# Altium PCB Telemetry_PCB_2.PcbDoc
Units mm, origin at the board's own origin, x right, y up, seen from the top; angles counter-clockwise.
Board outline 101.5 x 83.5 mm, 2 copper layers (Top Layer, Bottom Layer); 55 components, 54 nets, 242 pads, 8 vias.
Unrouted connection lines stored in the file: 34.
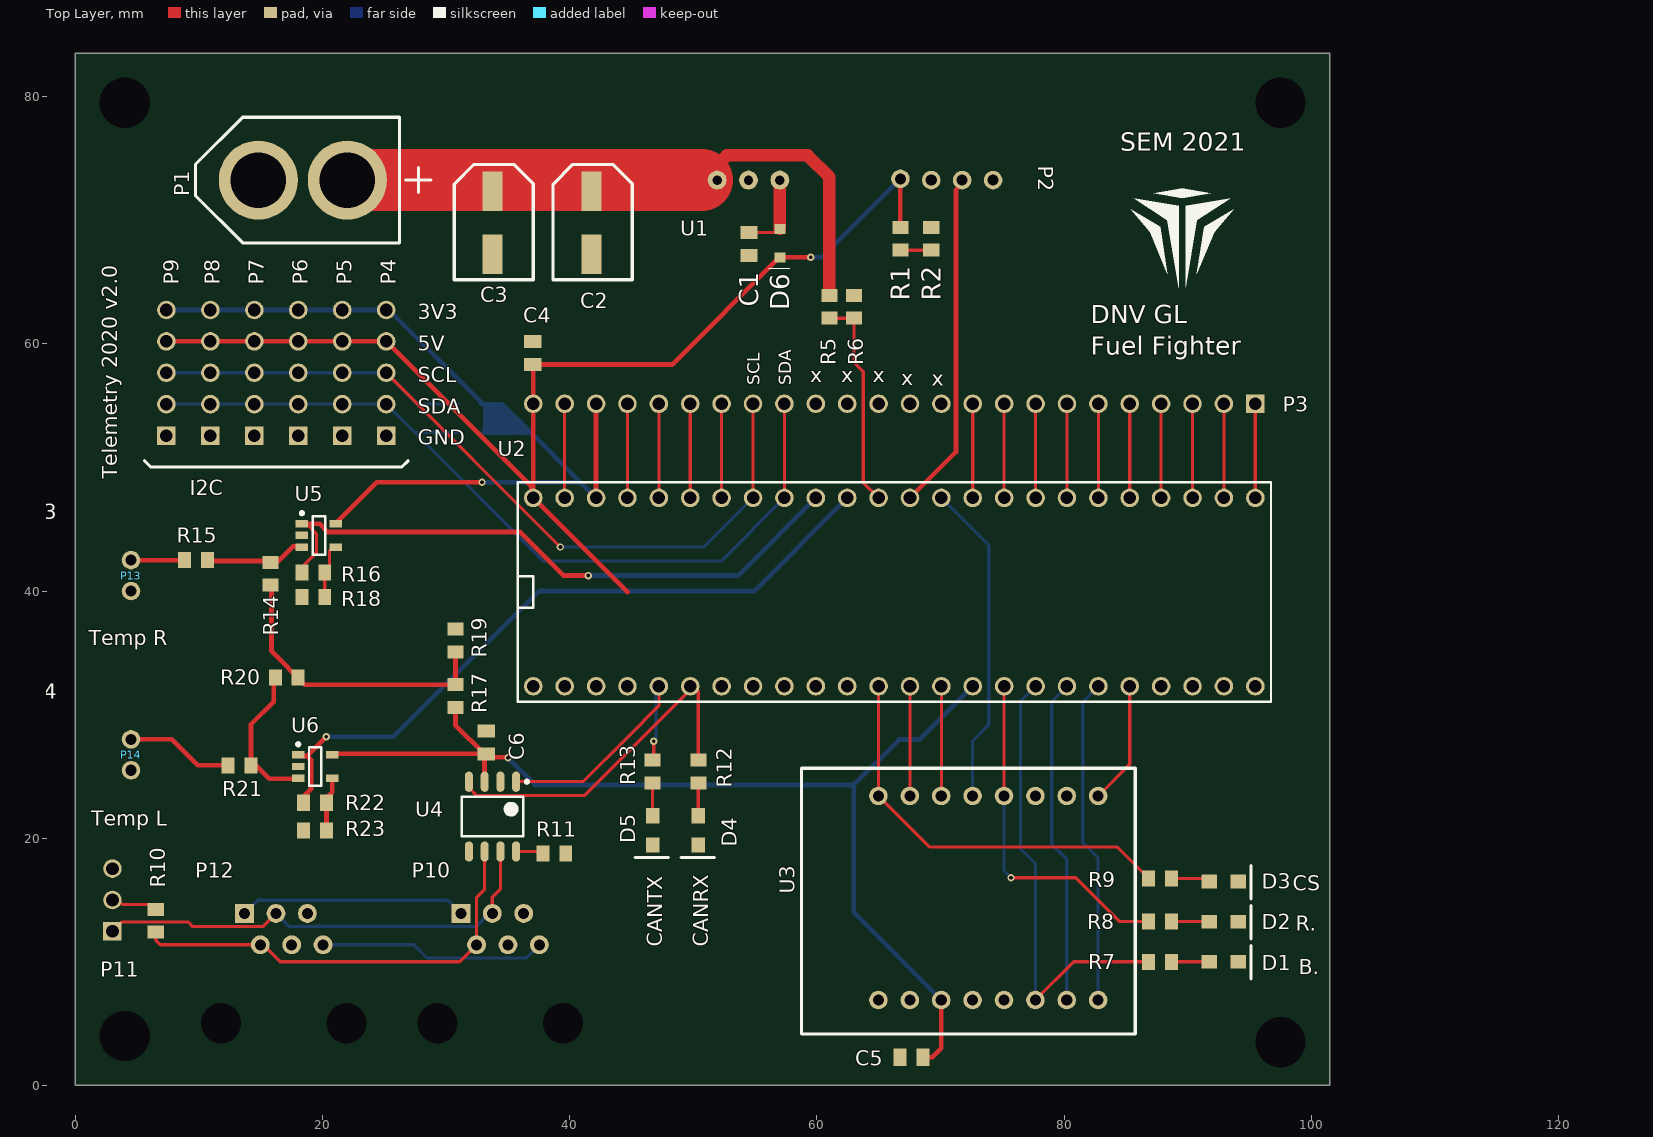
[diagram p0: Top Layer view]
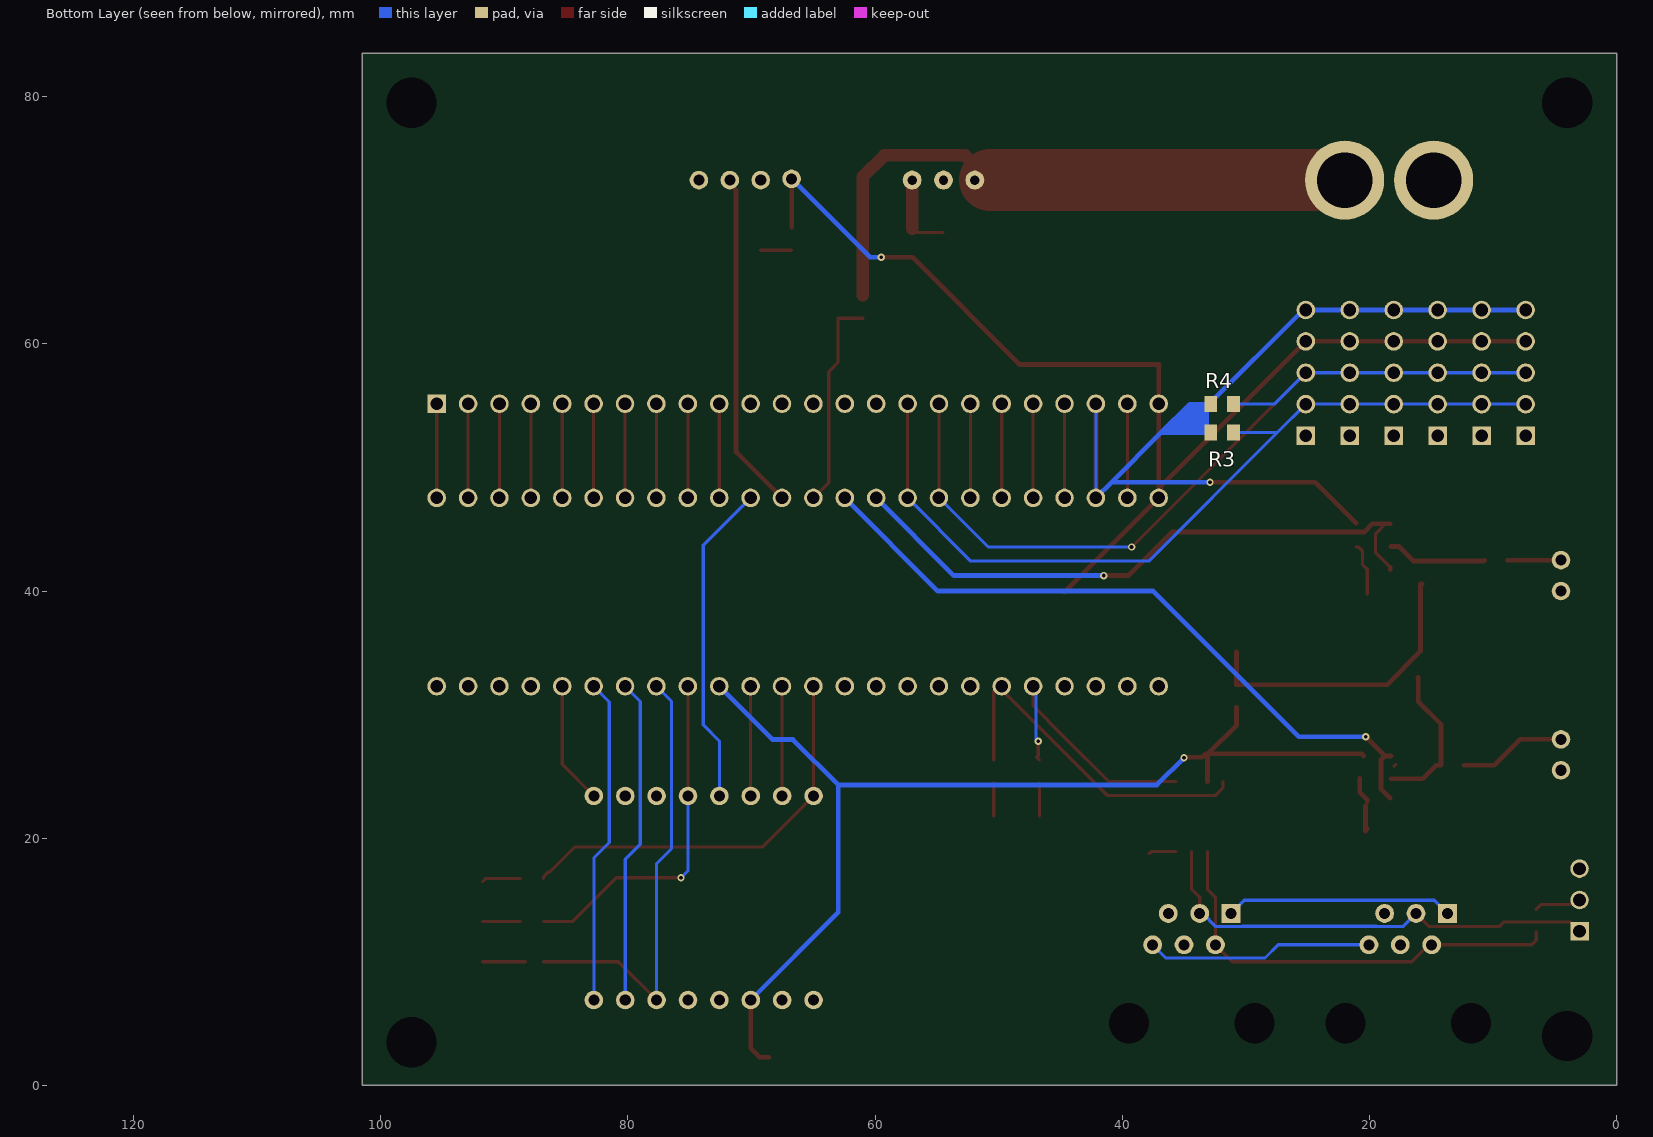
[diagram p1: Bottom Layer view, seen from below]
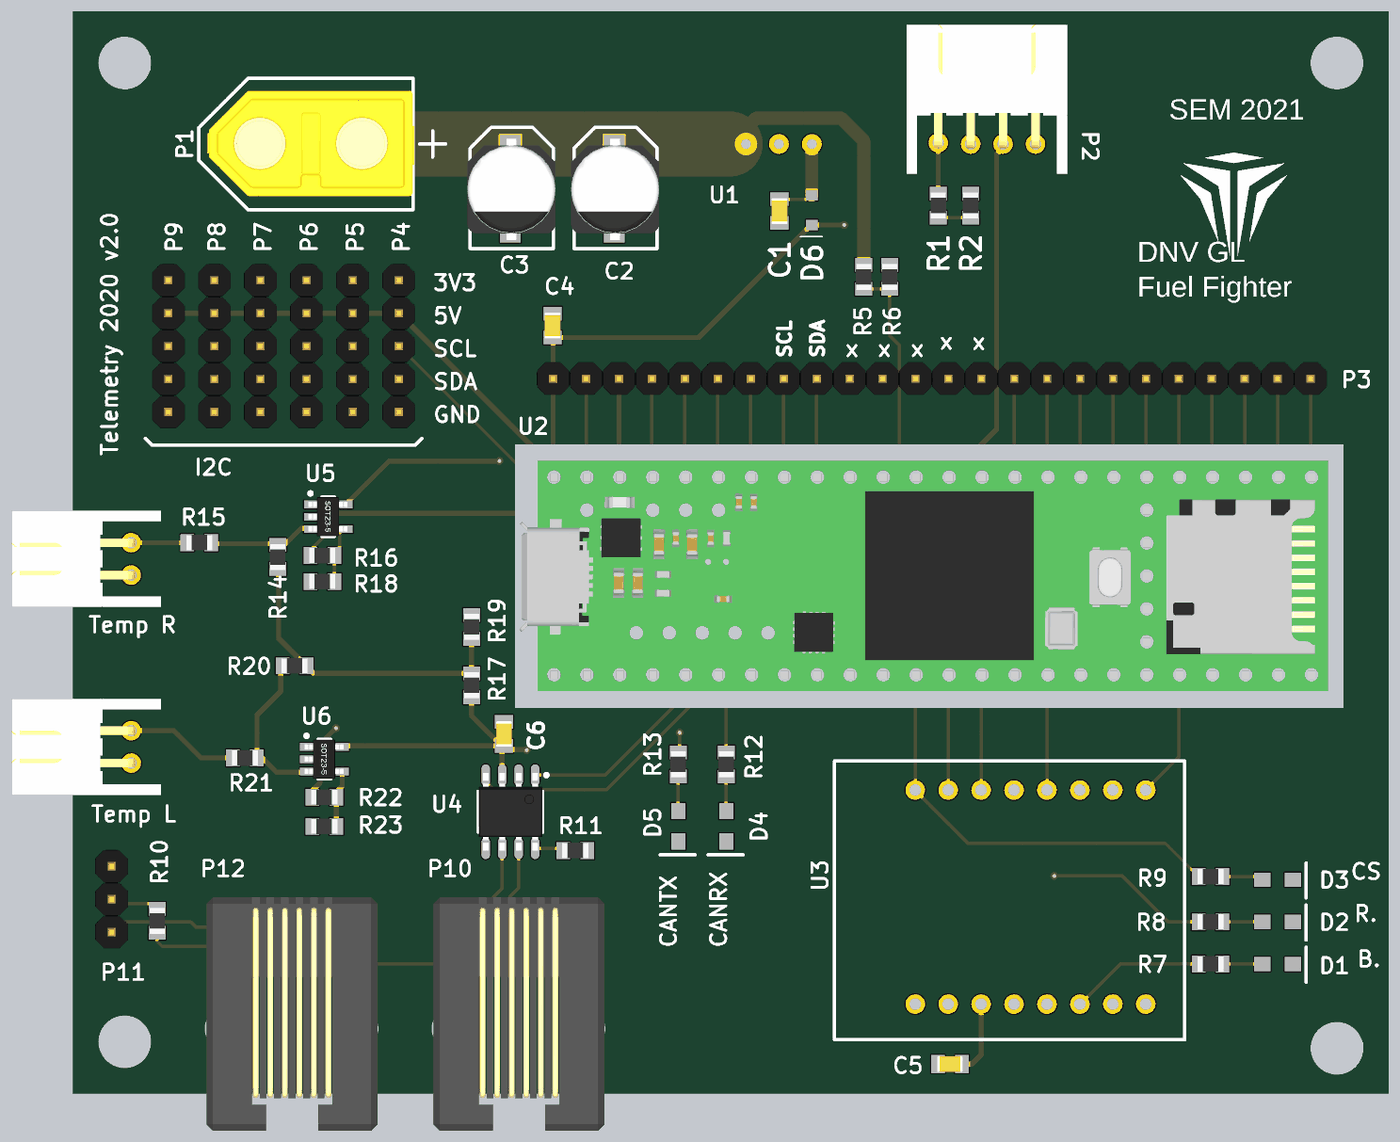
[diagram p2: 3D render of the assembled board from above, using the file's embedded part models]

## Layer stack, top to bottom
Top Solder: solder mask 0.0102, Solder Resist, Dk 3.5
Top Layer: signal copper 0.0356
Dielectric 1: dielectric 0.32, FR-4, Dk 4.8
Bottom Layer: signal copper 0.0356
Bottom Solder: solder mask 0.0102, Solder Resist, Dk 3.5

## Board outline
0,0 0,83.5 101.5,83.5 101.5,0

## Design rules (kind name [scope] priority, off if disabled: settings)
Clearance [All] p1: gap=0.178 ignorepadtopadclearanceinfootprint=FALSE
HoleSize [All] p1: absolutevalues=TRUE maxlimit=25.4 minlimit=0.025 maxpercent=80.000 minpercent=20.000
MinimumSolderMaskSliver [All] p1: minsoldermaskwidth=0.076
PlaneConnect [All] p1: planeconnectstyle=Relief reliefexpansion=0.508 reliefentries=4 reliefconductorwidth=0.508 reliefairgap=0.254
PolygonConnect PolygonConnect_XT-60 [HasFootprint('XT-60')] p1: thpad.connectstyle=Relief thpad.reliefconductorwidth=2.5 thpad.reliefentries=4 thpad.polygonreliefangle="90 Angle" thpad.airgapwidth=0.254 smdpad.connectstyle=Relief smdpad.reliefconductorwidth=0.254 smdpad.reliefentries=4 smdpad.polygonreliefangle="90 Angle" smdpad.airgapwidth=0.254 via.connectstyle=Relief via.reliefconductorwidth=0.254 via.reliefentries=4 via.polygonreliefangle="90 Angle" via.airgapwidth=0.254
PolygonConnect [All] p2: thpad.connectstyle=Relief thpad.reliefconductorwidth=0.762 thpad.reliefentries=4 thpad.polygonreliefangle="90 Angle" thpad.airgapwidth=0.254 smdpad.connectstyle=Relief smdpad.reliefconductorwidth=0.762 smdpad.reliefentries=4 smdpad.polygonreliefangle="90 Angle" smdpad.airgapwidth=0.254 via.connectstyle=Direct via.reliefconductorwidth=0.762 via.reliefentries=4 via.polygonreliefangle="90 Angle" via.airgapwidth=0.254
RoutingVias [All] p1: holewidth=0.3 width=0.6 viastyle="Through Hole" minholewidth=0.3 minwidth=0.6 maxholewidth=0.6 maxwidth=1.27 viatemplateguid#1={B7852F3B-45DD-46EC-AEA8-30D5E9FE662B} viatemplatename#1=v60h30
SilkToSolderMaskClearance [IsPad] p1: minsilkscreentomaskgap=0.178 clearancetoexposedcopper=TRUE
SolderMaskExpansion [All] p1: expansion=0.102 istentingtop=FALSE
Width [All] p1: maxlimit=7.62 minlimit=0.254 preferedwidth=0.254
26 further rules are at their usual default settings.

## Classes and differential pairs
component class Telemetry_temp_meas: P13 P14 R14 R15 R16 R17 R18 R19 R20 R21 R22 R23 U5 U6
component class Telemetry_canbus: C6 D4 D5 P10 P11 P12 R10 R11 R12 R13 U4
component class Telemetry_schematic: C1 C2 C3 C4 C5 D1 D2 D3 D6 P1 P2 P3 P4 P5 P6 P7 P8 P9 R1 R2 R3 R4 R5 R6 R7 R8 R9 U1 U2 U3

## Components (designator, comment, footprint, x,y, rotation, side; value= is the part's Value field where it differs from the comment)
C1 "SMD" C_SMD_0805_pcb 54.5,68.075 r270 top value=1u
C2 "C_EL_SMT_Ø6.3" C_EL_SMT_Ø6.3 41.75,72.35 r90 top value=10u
C3 "C_EL_SMT_Ø6.3" C_EL_SMT_Ø6.3 33.75,72.35 r90 top value=10u
C4 "SMD" C_SMD_0805_pcb 37,59.25 r270 top value=10u
C5 "SMD" C_SMD_0805_pcb 67.655,2.286 r180 top value=100n
C6 "SMD" C_SMD_0805_pcb 33.25,27.75 r90 top value=100n
D1 "LED" D_LED_0805 91.75,10 r0 top
D2 "LED" D_LED_0805 91.75,13.25 r0 top
D3 "LED" D_LED_0805 91.75,16.5 r0 top
D4 "LED" D_LED_0805 50.4,21.8 r270 top
D5 "LED" D_LED_0805 46.7,21.8 r270 top
D6 "D_CUS10S30" D_SC-76 57,69.3 r270 top
P1 "XT-60" XT-60 14.8,73.25 r270 top
P2 "JST_SE_4PIN" JST_SE_4PIN 76.65,76.65 r180 top
P3 "1x24_M" PIN_HEADER_M_1x24 39.588,55.154 r0 top
P4 "1x5_M" PIN_HEADER_M_1x5 25.146,62.738 r270 top
P5 "1x5_M" PIN_HEADER_M_1x5 21.59,62.738 r270 top
P6 "1x5_M" PIN_HEADER_M_1x5 18.034,62.738 r270 top
P7 "1x5_M" PIN_HEADER_M_1x5 14.478,62.738 r270 top
P8 "1x5_M" PIN_HEADER_M_1x5 10.922,62.738 r270 top
P9 "1x5_M" PIN_HEADER_M_1x5 7.366,62.738 r270 top
P10 "RJ11" RJ11_Connector 29.285,5.025 r0 top
P11 "CAN_Term" PIN_HEADER_M_1x3 3,17.54 r270 top
P12 "RJ11" RJ11_Connector 11.785,5.025 r0 top
P13 "Temp R" JST_SE_2PIN 4.5,42.5 r270 top
P14 "Temp L" JST_SE_2PIN 4.5,28 r270 top
R1 "SMD" R_SMD_0805_pcb 66.75,68.5 r270 top value=10k
R2 "SMD" R_SMD_0805_pcb 69.25,68.5 r270 top value=10k
R3 "SMD" R_SMD_0805_pcb 31.913,52.832 r180 bottom value=4.7k
R4 "SMD" R_SMD_0805_pcb 31.913,55.118 r180 bottom value=4.7k
R5 "SMD" R_SMD_0805_pcb 61,63 r90 top value=2.4M
R6 "SMD" R_SMD_0805_pcb 63,63 r270 top value=150K
R7 "SMD" R_SMD_0805_pcb 87.75,10 r180 top value=470
R8 "SMD" R_SMD_0805_pcb 87.75,13.25 r180 top value=470
R9 "SMD" R_SMD_0805_pcb 87.75,16.75 r180 top value=470
R10 "SMD" R_SMD_0805_pcb 6.5,13.325 r90 top value=120
R11 "SMD" R_SMD_0805_pcb 38.75,18.75 r180 top value=22k
R12 "SMD" R_SMD_0805_pcb 50.4,25.4 r270 top value=470
R13 "SMD" R_SMD_0805_pcb 46.7,25.4 r270 top value=470
R14 "SMD" R_SMD_0805_pcb 15.8,41.4 r270 top value=1k
R15 "SMD" R_SMD_0805_pcb 9.75,42.5 r0 top value=100k
R16 "SMD" R_SMD_0805_pcb 19.25,41.5 r180 top value=1k
R17 "SMD" R_SMD_0805_pcb 30.75,31.5 r270 top value=10k
R18 "SMD" R_SMD_0805_pcb 19.25,39.5 r0 top value=100k
R19 "SMD" R_SMD_0805_pcb 30.75,36 r270 top value=10k
R20 "SMD" R_SMD_0805_pcb 17.1,33 r0 top value=1k
R21 "SMD" R_SMD_0805_pcb 13.275,25.9 r0 top value=100k
R22 "SMD" R_SMD_0805_pcb 19.396,22.869 r180 top value=1k
R23 "SMD" R_SMD_0805_pcb 19.396,20.619 r180 top value=100k
U1 "TSR_0.6-4850WI" TSR_0.6-4850WI 51.92,73.25 r0 top
U2 "teensy_3.6" teensy_3.6 35.143,31.659 r90 top
U3 "LAMBDA80" LAMBDA62_SMT 82.753,6.909 r90 top
U4 "SN65GVD231d" SN65HVD231D_SMD 33.75,21.75 r270 top
U5 "AD8628" SOT-23-5 19.7,44.5 r0 top
U6 "AD8628" SOT-23-5 19.4,25.8 r0 top

## Footprints (in the part's own frame and the unit in brackets; to place one, negate y for a bottom-side part, rotate by r counter-clockwise, add the part's x,y. Pads: shape width x height; smd on the part's side, far side on the other; paste and mask are expansions set on the pad)
C_EL_SMT_Ø6.3 [mm]
  rect 3.2x1.6 smd: 1(-5.1,0) 2(0,0)
  silkscreen extent -7.16,-3.3 2.17,3.1, body extent -6.5,-3.47 1.3,3.33, height 5.5
C_SMD_0805_pcb [mm] "Chip Capacitor, 2-Leads, Body 2,00x1,25mm, IPC Medium Density"
  rect 1.05x1.4 smd: 1(-0.925,0) 2(0.925,0)
  body extent -1,-0.63 1,0.62, height 1.35
D_LED_0805 [mm]
  rect 1.25x1.1 smd: 1(0,0) 2(2.35,0)
  silkscreen extent 3.38,-1.4 3.38,1.3, body extent -0.3,-0.63 2.65,0.63, height 1
D_SC-76 [mm]
  rect 0.8x0.9 smd: 1(0,0) 2(2.3,0)
  silkscreen extent 3.2,-0.9 3.2,0.8, body extent 0.2,-0.7 2.1,0.7, height 0.8
JST_SE_2PIN [mm]
  round 1.5 hole 0.9: 1(0,0) 2(2.5,0)
  body extent -2.45,-9.2 4.95,2.3, height 6.1
JST_SE_4PIN [mm]
  round 1.5 hole 0.9: 1(9.9,3.3) 2(7.4,3.4) 3(4.9,3.4) 4(2.4,3.4)
  body extent -0.05,-5.8 12.35,5.7, height 6.1
LAMBDA62_SMT [mm]
  round 1.5 hole 0.9: 1(0,17.78) 2(0,15.24) 3(0,12.7) 4(0,10.16) 5(0,7.62) 6(0,5.08) 7(0,2.54) 8(0,0) 9(16.51,0) 10(16.51,2.54) 11(16.51,5.08) 12(16.51,7.62) 13(16.51,10.16) 14(16.51,12.7) 15(16.51,15.24) 16(16.51,17.78)
  silkscreen extent -2.75,-3 18.75,24, body extent -2.79,-3.05 18.8,24.13, height 4
PIN_HEADER_M_1x3 [mm]
  rect 1.5x1.5 hole 1.02: 1(5.08,0)
  round 1.5 hole 1.02: 2(2.54,0) 3(0,0)
  body extent -1.27,-1.27 6.35,1.27, height 8.34
PIN_HEADER_M_1x5 [mm]
  rect 1.5x1.5 hole 1.02: 1(10.16,0)
  round 1.5 hole 1.02: 2(7.62,0) 3(5.08,0) 4(2.54,0) 5(0,0)
  body extent -1.27,-1.27 11.43,1.27, height 8.34
PIN_HEADER_M_1x24 [mm]
  round 1.5 hole 1.02: 1(-2.54,0) 2(0,0) 3(2.54,0) 4(5.08,0) 5(7.62,0) 6(10.16,0) 7(12.7,0) 8(15.24,0) 9(17.78,0) 10(20.32,0) 11(22.86,0) 12(25.4,0) 13(27.94,0) 14(30.48,0) 15(33.02,0) 16(35.56,0) 17(38.1,0) 18(40.64,0) 19(43.18,0) 20(45.72,0) 21(48.26,0) 22(50.8,0) 23(53.34,0)
  rect 1.5x1.5 hole 1.02: 24(55.88,0)
  body extent -3.81,-1.27 57.15,1.27, height 8.34
R_SMD_0805_pcb [mm]
  rect 1.05x1.3 smd: 1(-0.925,0) 2(0.925,0)
  body extent -1,-0.6 1,0.6, height 0.65
RJ11_Connector [mil]
  rect 60x60 hole 35.04: 1(75,350)
  round 60 hole 35.04: 2(125,250) 3(175,350) 4(225,250) 5(275,350) 6(325,250)
  round 60 hole 127.95 unplated: ""(0,0) ""(400,0)
  body extent -58,-310 462,399, height 461
SN65HVD231D_SMD [mm]
  oval 1.65x0.65 smd: 1(-2.825,1.905) 2(-2.825,0.635) 3(-2.825,-0.635) 4(-2.825,-1.905) 5(2.825,-1.905) 6(2.825,-0.635) 7(2.825,0.635) 8(2.825,1.905)
  silkscreen extent -2.95,-2.5 1.6,2.91, body extent -3,-2.45 3,2.45, height 1.91
SOT-23-5 [mm] "0.95 pitch"
  rect 1x0.6 smd: 1(-1.375,0.95) 2(-1.375,0) 3(-1.375,-0.95) 4(1.375,-0.95) 5(1.375,0.95)
  silkscreen extent -1.5,-1.55 0.5,1.92, body extent -1.52,-1.5 1.48,1.5, height 1.45
teensy_3.6 [mm]
  round 1.5 hole 1.016: 0(0.635,-4.445) 1(0.635,-6.985) 2(0.635,-9.525) 3(0.635,-12.065) 4(0.635,-14.605) 5(0.635,-17.145) 6(0.635,-19.685) 7(0.635,-22.225) 8(0.635,-24.765) 9(0.635,-27.305) 10(0.635,-29.845) 11(0.635,-32.385) 12(0.635,-34.925) 13(15.875,-34.925) 14(15.875,-32.385) 15(15.875,-29.845) 16(15.875,-27.305) 17(15.875,-24.765) 18(15.875,-22.225) 19(15.875,-19.685) 20(15.875,-17.145) 21(15.875,-14.605) 22(15.875,-12.065) 23(15.875,-9.525) 24(0.635,-40.005) 25(0.635,-42.545) 26(0.635,-45.085) 27(0.635,-47.625) 28(0.635,-50.165) 29(0.635,-52.705) 30(0.635,-55.245) 31(0.635,-57.785) 32(0.635,-60.325) 33(15.875,-60.325) 34(15.875,-57.785) 35(15.875,-55.245) 36(15.875,-52.705) 37(15.875,-50.165) 38(15.875,-47.625) 39(15.875,-45.085) +3V3(0.635,-37.465) +3V3(15.875,-6.985) A21(15.875,-42.545) A22(15.875,-40.005) AGND(15.875,-4.445) GND(0.635,-1.905) GND(15.875,-37.465) VIN(15.875,-1.905)
  silkscreen extent -0.64,-61.59 17.15,-0.63, body extent -0.62,-61.66 17.16,0.7, height 7.49
TSR_0.6-4850WI [mil]
  round 60 hole 30: 1(0,0) 2(100,0) 3(200,0)
  body extent -134,-91 327,217, height 528
XT-60 [mm]
  round 6.4 hole 4.5: 1(0,7.2) 2(0,0)
  silkscreen extent -5.08,-5.08 5.08,13.97, body extent -4.11,-4.41 4.02,11.52, height 15.5

## Part data
C1 C4 C5 C6: library part C_SMD_0805
D1 D2 D3 D4 D5: library part D_LED_0805_SMD
D6: "Schottky diode, 30V reverse voltage. 220mV forward drop @1A", Supplier Part Number 1=CUS10S30H3FCT-ND, Supplier Link 1=https://www.digikey.no/product-detail/en/toshiba-semiconductor-and-storage/CUS10S30H3F/CUS10S30H3FCT-ND/5114377
P2: Supplier Part Number 1=455-2243-ND, Supplier Link 1=https://www.digikey.com/product-detail/en/jst-sales-america-inc/S4B-XH-A-LF-SN/455-2243-ND/1651041
P3: library part PIN_HEADER_M_1x24
P4 P5 P6 P7 P8 P9: library part PIN_HEADER_M_1x5
P10 P12: library part RJ11_Connector
P11: library part PIN_HEADER_M_1x3
P13 P14: library part JST_SE_2PIN
R1 R2 R3 R4 R5 R6 R7 R8 R9 R10 R11 R12 R13 R14 R15 R16 R17 R18 R19 R20 R21 R22 R23: library part R_SMD_0805
U3: library part LAMBDA_80_DIP
U4: library part SN65HVD231D_SMD
U5 U6: library part AD8628WAUJZ-R7_SOT-23-5, Supplier Part Number 1=AD8628WAUJZ-R7CT-ND, Supplier Link 1=https://www.digikey.com/product-detail/en/analog-devices-inc/AD8628WAUJZ-R7/AD8628WAUJZ-R7CT-ND/2467896

## Free pads (board coordinates)
  round 1.524 hole 4.064 unplated: 2(4,4) 2(4,79.5) 2(97.5,3.5) 2(97.5,79.5)

## Via types
v1: diameter 0.6, hole 0.3, Top Layer to Bottom Layer, tented both sides, 8 vias

## Nets (pads, with @x,y where several pads share a name; then routed paths per layer and width w, separated by ;. In a path a pad name is that pad's centre, name@x,y a point inside that pad or via, vN(x,y) a via of type N, cw(c..) or ccw(c..) an arc to the next point about the centre after c; other vN are vias at no path point)
3V3: C5.1 C6.1 P3.3 P4.5 P5.5 P6.5 P7.5 P8.5 P9.5 R3.1 R4.1 R17.2 U2.+3V3 U3.3 U4.3 U5.5 U6.5 | length 171.4
  Top Layer w0.381: U6.5@20.45,26.65 20.625,26.825 C6.1@33.075,26.825 ; U5.5@21.075,45.5 24.375,48.8 v1(32.9,48.8) ; R17.2 30.75,29.15 C6.1@33.075,26.825 ; U4.3 33.095,24.595 C6.1@33.095,26.825 ; v1(35,26.5) 34.958,26.542 33.533,26.542 C6.1 C6.1@33.095,26.825 ; U2.+3V3@42.128,47.534 P3.3 ; C5.1 69.342,2.286 70.068,3.012 U3.3@70.068,6.894 ; U3.3@70.436,7.262 70.589,7.11 U3.3@70.589,6.894 ; C6.1@33.075,26.825 C6.1@33.095,26.825
  Bottom Layer w0.254: U2.+3V3@42.128,47.534 P3.3
  Bottom Layer w0.381: P9.5 P8.5 P7.5 P6.5 P5.5 P4.5 25.362,62.738 R4.1@32.982,55.118 ; R4.1 R4.1@32.982,55.118 ; v1(32.9,48.8) 32.902,48.802 40.86,48.802 ; R3.1@33.02,52.832 36.83,52.832 ; v1(35,26.5) 37.192,24.308 62.967,24.308 ; U2.+3V3@42.128,47.534 40.86,48.802 ; U3.3@70.068,6.894 U3.3 62.967,13.995 62.967,24.308 ; U2.+3V3@72.608,32.294 68.295,27.981 66.64,27.981 62.967,24.308 ; R4.1@32.982,55.118 34.544,55.118 36.83,52.832 ; 36.83,52.832 40.86,48.802
5V: C4.2 D6.2 P2.1 P3.1 P4.4 P5.4 P6.4 P7.4 P8.4 P9.4 R1.1 U2.VIN | length 97.1
  Top Layer w0.254: 36.83,48.514 36.83,47.752 U2.VIN ; P3.1 P3.1@37.267,55.373
  Top Layer w0.381: P9.4 P8.4 P7.4 P6.4 P5.4 P4.4 36.83,48.514 ; C4.2@37,58.175 37.048,58.127 P3.1 U2.VIN 44.679,39.903 ; C4.2 48.275,58.325 56.95,67 D6.2 v1(59.5,67) ; R1.1 P2.1
  Bottom Layer w0.254: P3.1 P3.1@37.12,55.154
  Bottom Layer w0.381: v1(59.5,67) 60.4,67 P2.1
5V_CAN: P10.6 P12.6 | length 18.4
  Bottom Layer w0.254: P12.6 27.379,11.375 28.446,10.308 36.473,10.308 P10.6
48V: C2.2 C3.2 P1.1 R5.2 U1.1 | length 50.5
  Top Layer w0.508: 47.75,73 48,73.25
  Top Layer w1: 50.71,73.25 52.71,75.25 59.25,75.25 61,73.5 R5.2
  Top Layer w5: P1.1 33.75,73.25 41.75,73.25 48,73.25 50.71,73.25
GND: C1.2 C2.1 C3.1 C4.1 C5.2 C6.2 D1.2 D2.2 D3.2 D4.2 D5.2 P1.2 P2.4 P3.2 P3.15 P4.1 P5.1 P6.1 P7.1 P8.1 P9.1 P13.2 P14.2 R2.1 R6.1 R11.1 R18.1 R19.1 R23.2 U1.2 U2.AGND U2.GND U3.2 U4.2 U5.2 U6.2 | length 15.5
  Top Layer w0.254: U6.2@17.852,25.973 U6.2 ; U2.AGND P3.2 ; U2.GND@72.608,47.534 P3.15
NetC1_1: C1.1 D6.1 U1.3 | length 6.1
  Top Layer w0.254: C1.1 D6.1@56.65,69
  Top Layer w1: D6.1 U1.3
NetD1_1: D1.1 R7.1 | length 3.4
  Top Layer w0.254: R7.1@88.304,10 D1.1
NetD2_1: D2.1 R8.1 | length 3.1
  Top Layer w0.254: R8.1@88.695,13.25 D2.1
NetD3_1: D3.1 R9.1 | length 3.2
  Top Layer w0.254: R9.1 91.5,16.75 D3.1
NetD4_1: D4.1 R12.2 | length 2.7
  Top Layer w0.254: D4.1 R12.2
NetD5_1: D5.1 R13.2 | length 2.7
  Top Layer w0.254: D5.1 R13.2
NetP2_2: P2.2 R1.2 R2.2 | length 2.5
  Top Layer w0.254: R1.2 R2.2
NetP2_3: P2.3 U2.14 | length 27.5
  Top Layer w0.381: U2.14 71.25,51.256 71.25,72.467 71.75,72.967 P2.3
NetP3_4: P3.4 U2.23 | length 7.6
  Top Layer w0.254: U2.23 P3.4
NetP3_5: P3.5 U2.22 | length 7.6
  Top Layer w0.254: U2.22 P3.5
NetP3_6: P3.6 U2.21 | length 7.6
  Top Layer w0.254: U2.21 P3.6
NetP3_7: P3.7 U2.20 | length 7.6
  Top Layer w0.254: U2.20 P3.7
NetP3_8: P3.8 P4.3 P5.3 P6.3 P7.3 P8.3 P9.3 R4.2 U2.19 | length 69.5
  Top Layer w0.254: P4.3 v1(39.243,43.561) ; U2.19 P3.8
  Bottom Layer w0.254: P9.3 P8.3 P7.3 P6.3 P5.3 P4.3 27.686,55.118 R4.2 ; v1(39.243,43.561) 50.855,43.561 U2.19
NetP3_9: P3.9 P4.2 P5.2 P6.2 P7.2 P8.2 P9.2 R3.2 U2.18 | length 68.6
  Top Layer w0.254: U2.18 P3.9
  Bottom Layer w0.254: P9.2 P8.2 P7.2 P6.2 P5.2 P4.2 27.432,52.832 ; R3.2 27.432,52.832 ; U2.18 52.252,42.418 37.846,42.418 27.432,52.832
NetP3_16: P3.16 U2.A22 | length 7.6
  Top Layer w0.254: U2.A22 P3.16
NetP3_17: P3.17 U2.A21 | length 7.6
  Top Layer w0.254: U2.A21 P3.17
NetP3_18: P3.18 U2.39 | length 7.6
  Top Layer w0.254: U2.39 P3.18
NetP3_19: P3.19 U2.38 | length 7.6
  Top Layer w0.254: U2.38 P3.19
NetP3_20: P3.20 U2.37 | length 7.6
  Top Layer w0.254: U2.37 P3.20
NetP3_21: P3.21 U2.36 | length 7.6
  Top Layer w0.254: U2.36 P3.21
NetP3_22: P3.22 U2.35 | length 7.6
  Top Layer w0.254: U2.35 P3.22
NetP3_23: P3.23 U2.34 | length 7.6
  Top Layer w0.254: U2.34 P3.23
NetP3_24: P3.24 U2.33 | length 7.6
  Top Layer w0.254: U2.33 P3.24
NetP10_1: P10.1 P12.1 | length 18.4
  Bottom Layer w0.254: P12.1 14.757,14.982 30.123,14.982 P10.1
NetP10_2: P10.2 P12.2 R10.1 U4.6 | length 35.7
  Top Layer w0.254: R10.1 6.5,11.75 6.875,11.375 P12.2 15.199,11.375 16.574,10 31.085,10 P10.2 32.46,15.21 33.115,15.865 U4.6
NetP10_3: P10.3 P11.1 P12.3 U4.7 | length 38
  Top Layer w0.254: P11.1 3.77,13.23 9.105,13.23 9.487,12.848 15.163,12.848 16.17,13.855 16.17,13.975 P12.3 ; P10.3 33.73,15.23 34.385,15.885 U4.7
  Bottom Layer w0.254: P12.3 17.297,12.848 19.394,12.848 19.419,12.874 30.276,12.874 30.302,12.848 32.425,12.848 33.491,13.915 P10.3
NetP11_2: P11.2 R10.2 | length 3.8
  Top Layer w0.254: P11.2 3.418,15 3.77,14.648 6.102,14.648 R10.2
NetP13_1: P13.1 R15.1 | length 4.3
  Top Layer w0.381: P13.1 R15.1
NetP14_1: P14.1 R21.1 | length 8.7
  Top Layer w0.381: P14.1 7.8,28 9.9,25.9 R21.1
NetR5_1: R5.1 R6.2 U2.15 | length 17.4
  Top Layer w0.254: R5.1 R6.2 63,58.5 63.503,57.997 63.75,57.75 63.75,48.772 U2.15
NetR7_2: R7.2 U2.25 U3.6 | length 36.8
  Top Layer w0.254: U3.6 80.764,10 R7.2
  Bottom Layer w0.254: U3.6 77.673,17.95 76.468,19.155 76.468,31.074 U2.25
NetR8_2: R8.2 U2.24 U3.12 | length 28.3
  Top Layer w0.254: U3.12@75.148,23.404 U2.24 ; v1(75.7,16.8) 80.95,16.8 84.5,13.25 R8.2
  Bottom Layer w0.254: U3.12 75.133,17.367 v1(75.7,16.8)
NetR9_2: R9.2 U2.10 U3.16 | length 33.6
  Top Layer w0.254: U2.10 64.988,23.404 69.092,19.3 84.275,19.3 86.302,17.273 86.427,17.273 86.825,16.875 R9.2
NetR11_2: R11.2 U4.8 | length 2.2
  Top Layer w0.254: U4.8 37.65,18.925 R11.2
NetR12_1: R12.1 U2.4 U4.4 | length 28.9
  Top Layer w0.254: U4.4 31.845,24.075 32.475,23.445 41.17,23.445 49.748,32.023 U2.4 49.8,32.242 50.058,32.242 50.4,31.9 R12.1
NetR13_1: R13.1 U2.3 U4.1 | length 21.8
  Top Layer w0.254: U4.1 41.075,24.575 44.763,28.262 47.208,30.708 47.208,31.786 U2.3@46.954,32.04 ; R13.1 46.925,26.55 46.8,26.675 v1(46.8,27.85)
  Bottom Layer w0.254: v1(46.8,27.85) 46.991,28.041 46.991,32.077 U2.3
NetR14_1: R14.1 R15.2 U5.3 | length 8.1
  Top Layer w0.381: R15.2 10.75,42.425 15.75,42.425 16.425,42.425 17.6,43.6 U5.3@18.25,43.6
NetR16_1: R16.1 R18.2 U5.4 | length 4.3
  Top Layer w0.254: R18.2@20.175,39.75 20.175,41.75 20.573,42.148 20.573,43.248 20.875,43.55 U5.4
NetR16_2: R16.2 U2.17 U5.1 | length 50.4
  Top Layer w0.254: R16.2@18.325,41.925 19.5,43.1 19.5,44.646 U5.1@18.696,45.45
  Top Layer w0.381: R16.2@18.325,41.75 R16.2@18.325,41.925 ; U5.1 18.525,45.45 18.696,45.45 19.754,45.45 20.434,44.77 35.98,44.77 39.5,41.25 v1(41.5,41.25)
  Bottom Layer w0.381: v1(41.5,41.25) 53.624,41.25 U2.17
NetR20_1: R20.1 R21.2 U6.3 | length 12.4
  Top Layer w0.381: R20.1@16.075,33 16.038,32.963 16.038,31.037 14.2,29.2 R21.2 14.6,25.9 15.7,24.8 U6.3@18.25,24.8
NetR22_1: R22.1 R23.1 U6.4 | length 4.6
  Top Layer w0.381: R23.1@20.175,20.75 20.312,20.887 R23.1@20.312,20.588 ; R22.1@20.175,22.95 20.175,23.125 20.775,23.725 U6.4 ; R23.1 R22.1@20.321,22.619
NetR22_2: R22.2 U2.16 U6.1 | length 56.7
  Top Layer w0.381: U6.1@18.259,26.659 18.25,26.65 18.771,26.65 ; R22.2@18.325,23.242 19.068,23.985 19.068,26.353 18.771,26.65 ; v1(20.3,28.2) 18.771,26.671 18.771,26.65
  Bottom Layer w0.381: v1(20.3,28.2) 25.7,28.2 37.5,40 54.914,40 U2.16
NetU2_11: U2.11 U3.15 | length 8.9
  Top Layer w0.254: U3.15@67.528,23.404 U2.11
NetU2_12: U2.12 U3.14 | length 8.9
  Top Layer w0.254: U3.14@70.068,23.404 U2.12
NetU2_13: U2.13 U3.13 | length 26.2
  Bottom Layer w0.254: U2.13 73.9,43.702 73.9,29.172 72.593,27.865 U3.13
NetU2_26: U2.26 U3.7 | length 26.4
  Bottom Layer w0.254: U3.7 80.213,18.287 79,19.5 79,31.066 U2.26
NetU2_27: U2.27 U3.8 | length 26.4
  Bottom Layer w0.254: U3.8 82.753,18.404 81.5,19.657 81.5,31.026 U2.27
NetU2_28: U2.28 U3.9 | length 9.9
  Top Layer w0.254: U3.9 85.308,25.974 U2.28
V_REF: R14.2 R17.1 R19.2 R20.2 | length 24.2
  Top Layer w0.381: R14.2@15.75,40.575 15.875,40.575 15.875,35.125 18.575,32.425 R17.1 R19.2
pads on no net: P3.10 P3.11 P3.12 P3.13 P3.14 P10. P10.4 P10.5 P11.3 P12. P12.4 P12.5 U2.0 U2.1 U2.2 U2.5 U2.6 U2.7 U2.8 U2.9 U2.29 U2.30 U2.31 U2.32 U3.1 U3.4 U3.5 U3.10 U3.11 U4.5
copper on no net: | length 0.4
  Bottom Layer w0.254: 17.5,11.375 17.612,11.487 17.612,11.263

## Polygon pours and split planes (outlines as drawn)
no net on Top Overlay (solid): 89.55,71.775 87.249,72.183 89.55,72.592 91.851,72.183
no net on Top Overlay (solid): 90.738,65.688 91.332,69.474 93.707,70.884 92.148,69.028
no net on Top Overlay (solid): 88.362,65.688 87.768,69.474 85.393,70.884 86.952,69.028
no net on Top Overlay (solid): 89.253,64.537 89.253,71.181 85.615,71.775 88.362,69.993
no net on Top Overlay (solid): 89.847,64.574 89.847,71.181 93.485,71.775 90.738,69.993
no net on Top Overlay (solid): 40.386,2.125

## Other copper
Top Layer:
  region: 124.7,32.3
  region: 118.6,32.6
  region net GND: 45.452,74.99
Bottom Layer:
  region net 3V3: 36.5,53 32.982,53 32.982,55.118 34.544,55.118

## Silkscreen, mask and mechanical layers (free items; w line width, h text height)
Top Overlay:
  lines w0.254: 5.588,50.546 6.096,50.038 26.416,50.038 26.924,50.546
  text "SEM 2021" at 84.55,75.15 h2.54
  text "3V3" at 27.686,61.976 h1.2
  text "5V" at 27.686,59.436 h1.2
  text "DNV GL / Fuel Fighter" at 82.15,58.65 h2.54
  text "SCL" at 27.686,56.896 h1.2
  text "x" at 59.476,56.896 h1.2
  text "x" at 61.976,56.896 h1.2
  text "x" at 64.516,56.896 h1.2
  text "SCL" at 55.372,56.642 h1.02 r90
  text "SDA" at 57.912,56.642 h1.02 r90
  text "x" at 66.802,56.642 h1.2
  text "x" at 69.3,56.6 h1.2
  text "SDA" at 27.686,54.356 h1.2
  text "GND" at 27.686,51.816 h1.2
  text "Telemetry 2020 v2.0" at 3.4,49.1 h1.2 r90
  text "I2C" at 9.25,47.75 h1.2
  text "CS" at 98.5,15.75 h1.2
  text "R." at 98.75,12.5 h1.2
  text "CANTX" at 47.5,11.2 h1.2 r90
  text "CANRX" at 51.2,11.2 h1.2 r90
  text "B." at 99,9 h1.2
Mechanical 1:
  lines w0.254: 0.225,0.175 101,0.175 101,83 0.225,83 0.225,0.175